# Altium PCB UPCNSL-ABS-FLS-ARD.PcbDoC (part 1 of 2)
Units mm, origin at the board's own origin, x right, y up, seen from the top; angles counter-clockwise.
Board outline 96 x 90 mm, 2 copper layers (Top Layer, Bottom Layer); 116 components, 156 nets, 541 pads, 110 vias.
Unrouted connection lines stored in the file: 18.
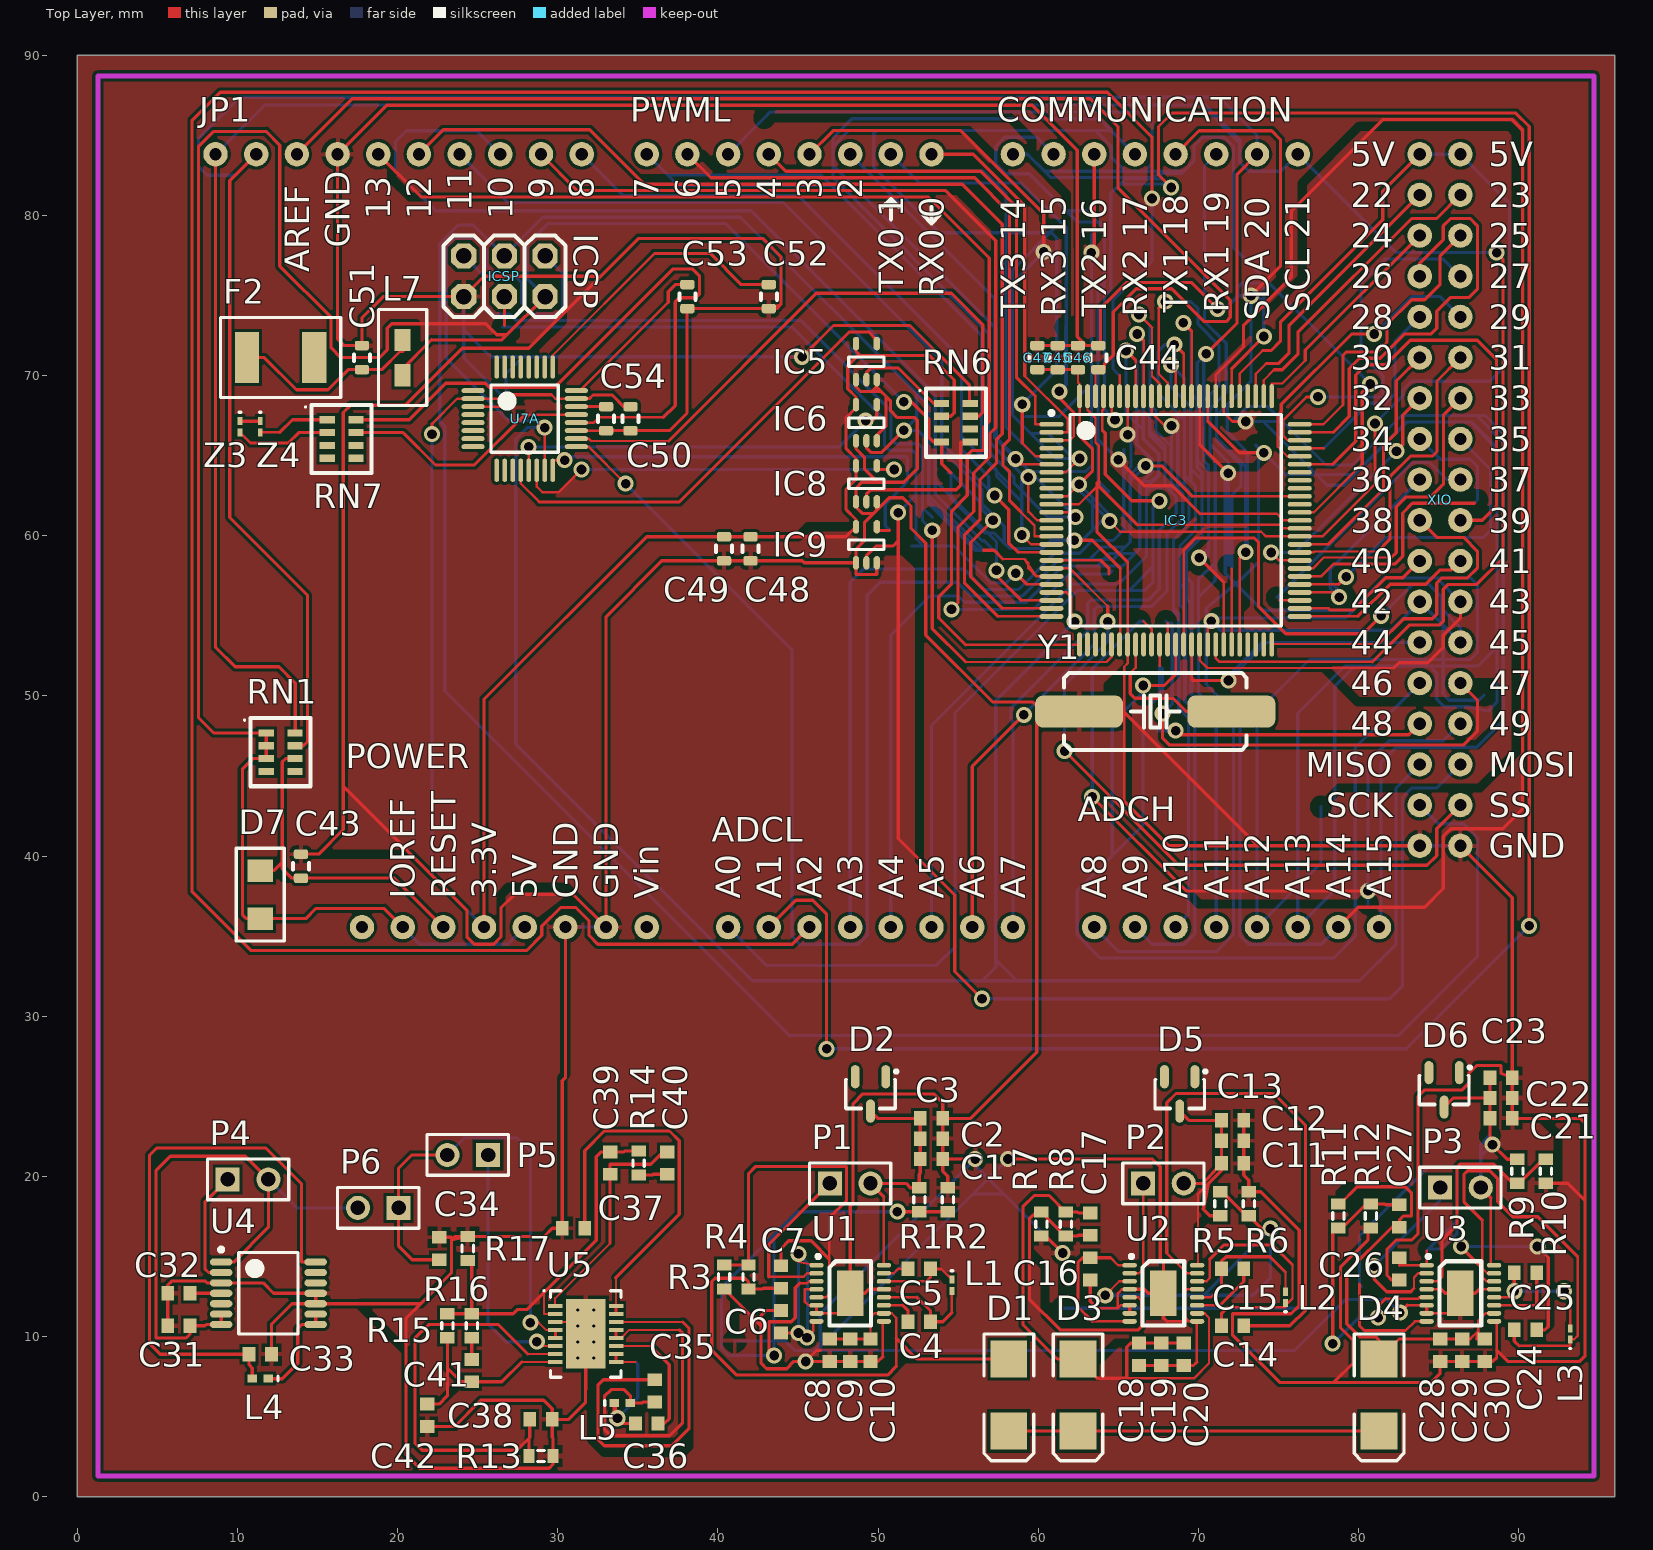
[diagram p0: Top Layer view]
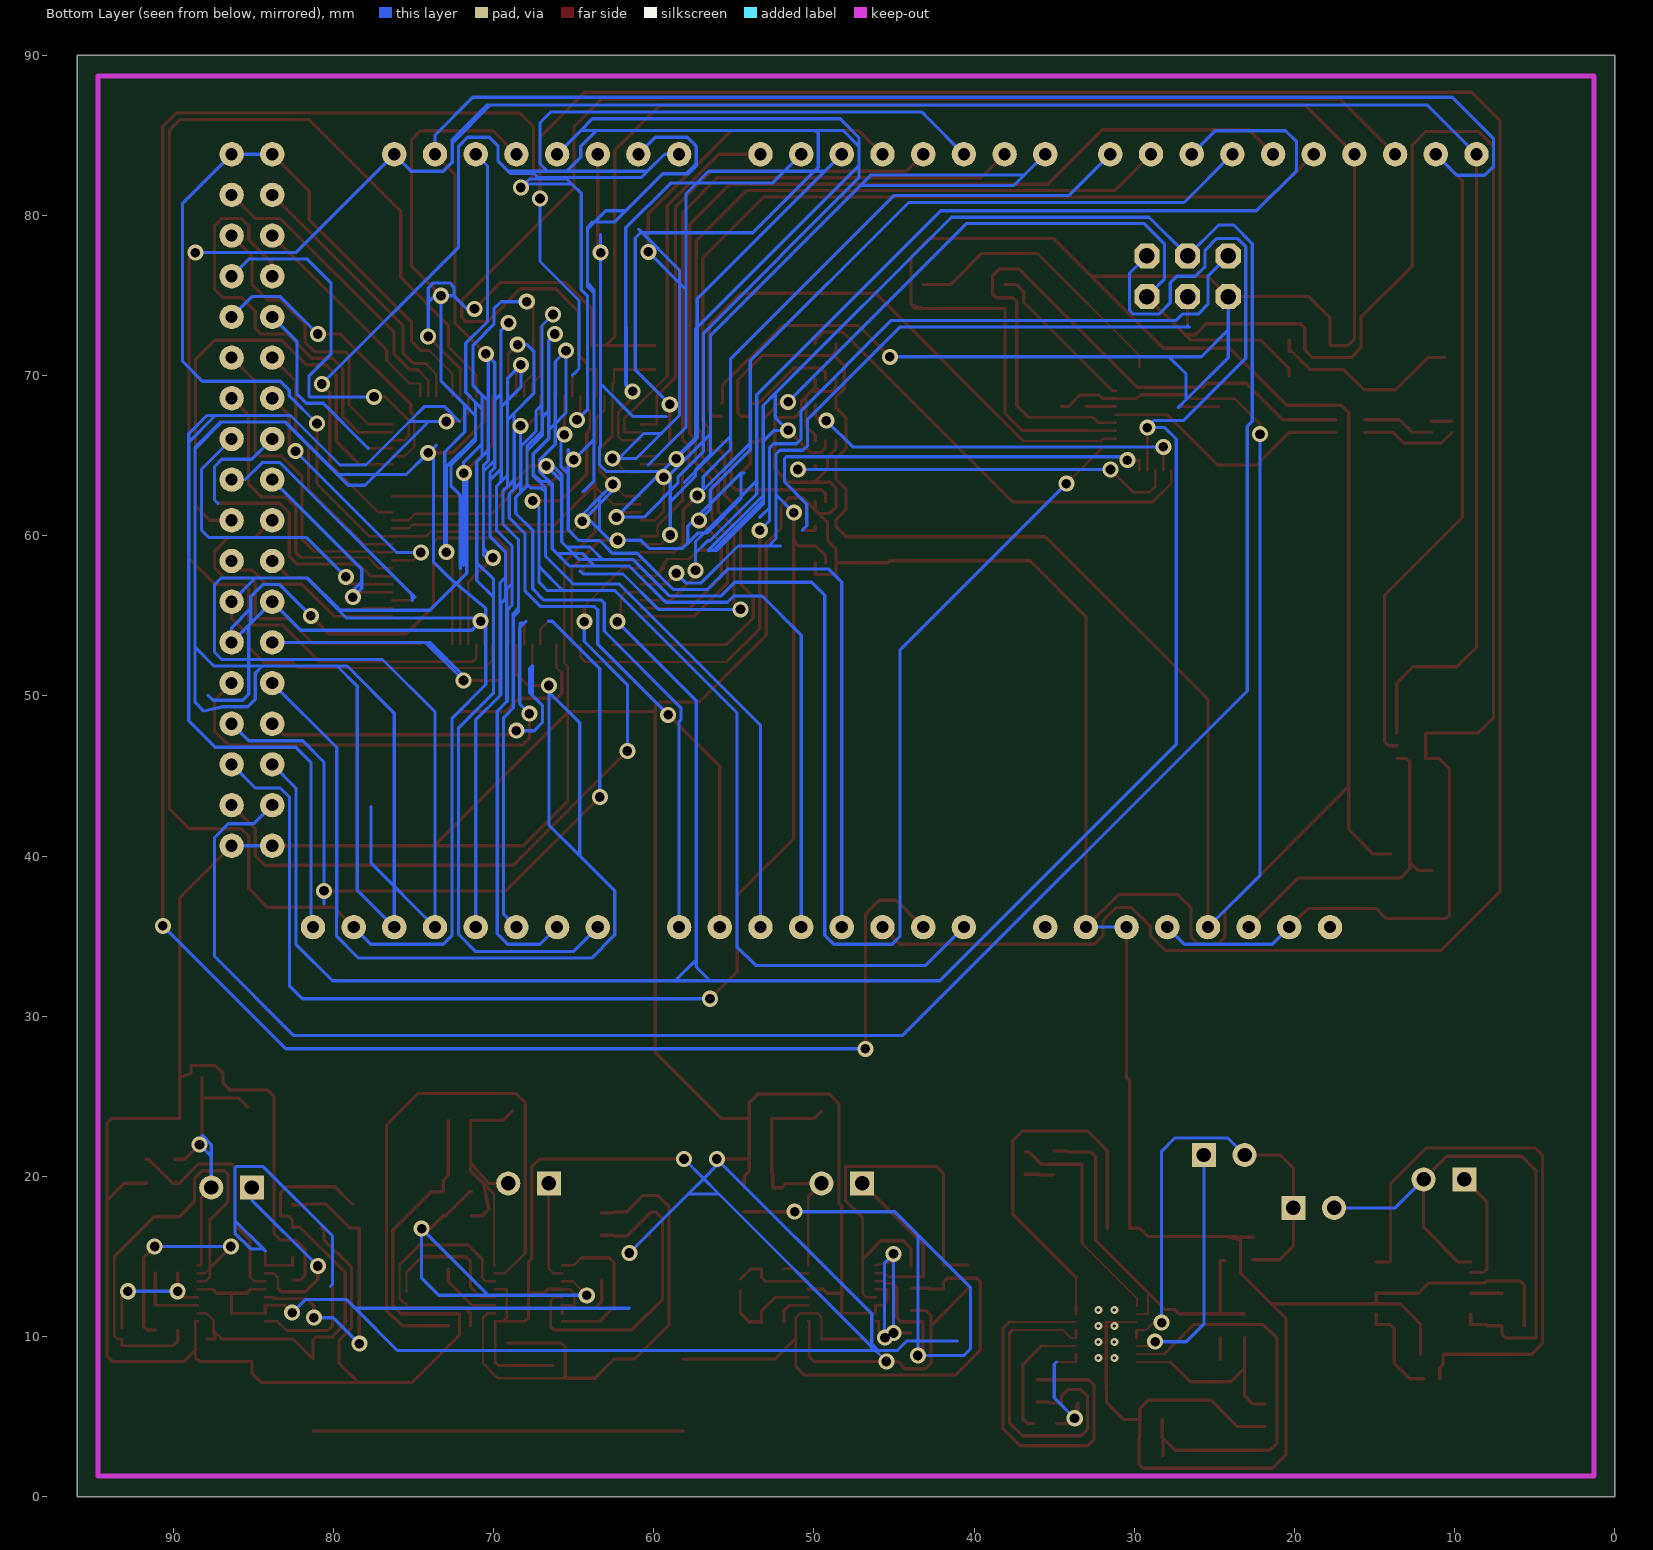
[diagram p1: Bottom Layer view, seen from below]

## Layer stack, top to bottom
Top Solder: solder mask 0.0102, Solder Resist, Dk 3.5
Top Layer: signal copper 0.0356
Dielectric 1: dielectric 0.32, FR-4, Dk 4.8
Bottom Layer: signal copper 0.0356
Bottom Solder: solder mask 0.0102, Solder Resist, Dk 3.5

## Board outline
0,0 96,0 96,90 0,90

## Design rules (kind name [scope] priority, off if disabled: settings)
Clearance [All] p1: gap=0.2
PolygonConnect [All] p1: connectstyle=Relief reliefconductorwidth=0.254 reliefentries=4 polygonreliefangle="90 Angle" airgapwidth=0.254
RoutingVias [All] p1: holewidth=0.6 width=1 viastyle="Through Hole" minholewidth=0.711 minwidth=1.27 maxholewidth=0.711 maxwidth=1.27
SMDNeckDown [All] p1: percent=50.000
SolderMaskExpansion [All] p1: expansion=0.102
UnpouredPolygon [All] p1: allowunpoured=FALSE
Width [All] p1: maxlimit=0.2 minlimit=0.2 preferedwidth=0.2
29 further rules are at their usual default settings.

## Components (designator, comment, footprint, x,y, rotation, side; value= is the part's Value field where it differs from the comment)
ADCH "8x1F-H8.5" ADCH 63.5,35.56 r0 top
ADCL "8x1F-H8.5" ADCL 40.64,35.56 r0 top
C1 "Cap Semi" 1608[0603] 53.34,21.082 r180 top
C2 "Cap Semi" 1608[0603] 53.34,22.352 r180 top
C3 "Cap Semi" 1608[0603] 53.34,23.622 r180 top
C4 "Cap Semi" 1608[0603] 52.578,10.922 r0 top
C5 "Cap Semi" 1608[0603] 52.578,14.224 r0 top
C6 "Cap Semi" 1608[0603] 43.942,10.922 r270 top
C7 "Cap Semi" 1608[0603] 43.942,13.716 r270 top
C8 "Cap Semi" 1608[0603] 46.99,9.144 r90 top
C9 "Cap Semi" 1608[0603] 48.26,9.144 r90 top
C10 "Cap Semi" 1608[0603] 49.53,9.144 r90 top
C11 "Cap Semi" 1608[0603] 72.136,20.828 r180 top
C12 "Cap Semi" 1608[0603] 72.136,22.225 r180 top
C13 "Cap Semi" 1608[0603] 72.136,23.495 r180 top
C14 "Cap Semi" 1608[0603] 72.136,10.668 r180 top
C15 "Cap Semi" 1608[0603] 72.136,14.224 r180 top
C16 "Cap Semi" 1608[0603] 63.246,14.224 r90 top
C17 "Cap Semi" 1608[0603] 63.246,17.018 r90 top
C18 "Cap Semi" 1608[0603] 66.294,8.89 r90 top
C19 "Cap Semi" 1608[0603] 67.691,8.89 r90 top
C20 "Cap Semi" 1608[0603] 69.088,8.89 r90 top
C21 "Cap Semi" 1608[0603] 88.9,23.622 r180 top
C22 "Cap Semi" 1608[0603] 88.9,24.892 r180 top
C23 "Cap Semi" 1608[0603] 88.9,26.162 r180 top
C24 "Cap Semi" 1608[0603] 90.424,10.414 r180 top
C25 "Cap Semi" 1608[0603] 90.424,13.97 r180 top
C26 "Cap Semi" 1608[0603] 82.55,14.224 r90 top
C27 "Cap Semi" 1608[0603] 82.55,17.526 r90 top
C28 "Cap Semi" 1608[0603] 85.09,9.144 r90 top
C29 "Cap Semi" 1608[0603] 86.487,9.144 r90 top
C30 "Cap Semi" 1608[0603] 87.884,9.144 r90 top
C31 "Cap Semi" 1608[0603] 6.35,10.668 r0 top
C32 "Cap Semi" 1608[0603] 6.35,12.7 r0 top
C33 "Cap Semi" 1608[0603] 11.43,8.89 r180 top
C34 "Cap Semi" 1608[0603] 22.606,15.494 r270 top
C35 "Cap Semi" 1608[0603] 36.068,6.604 r90 top
C36 "Cap Semi" 1608[0603] 35.56,4.572 r0 top
C37 "Cap Semi" 1608[0603] 30.988,16.764 r0 top
C38 "Cap Semi" 1608[0603] 28.956,4.826 r180 top
C39 "Cap Semi" 1608[0603] 33.274,20.828 r270 top
C40 "Cap Semi" 1608[0603] 36.83,20.828 r270 top
C41 "Cap Semi" 1608[0603] 24.638,7.874 r90 top
C42 "Cap Semi" 1608[0603] 21.844,5.08 r90 top
C43 "22p" CAP0603 13.97,39.37 r90 top
C44 "100n" CAP0603 63.754,71.12 r90 top
C45 "100n" CAP0603 61.214,71.12 r90 top
C46 "100n" CAP0603 62.484,71.12 r90 top
C47 "100n" CAP0603 59.944,71.12 r90 top
C48 "100n" CAP0603 42.037,59.182 r270 top
C49 "100n" CAP0603 40.386,59.182 r270 top
C50 "100n" CAP0603 34.544,67.31 r270 top
C51 "100n" CAP0603 17.78,71.12 r90 top
C52 "22p" CAP0603 43.18,74.93 r90 top
C53 "22p" CAP0603 38.1,74.93 r90 top
C54 "100n" CAP0603 33.02,67.31 r270 top
COMMUNICATION "8x1F-H8.5" COMMUNICATION 58.42,83.82 r0 top
D1 "D Schottky" SMB 58.166,6.35 r270 top
D2 "HSMS-2824-TR1G" SOT23-3 49.53,25.146 r180 top
D3 "D Schottky" SMB 62.484,6.35 r270 top
D4 "D Schottky" SMB 81.28,6.35 r270 top
D5 "HSMS-2824-TR1G" SOT23-3 68.834,25.146 r180 top
D6 "HSMS-2824-TR1G" SOT23-3 85.344,25.4 r180 top
D7 "CD1206-S01575" "SMD DIODE" 11.43,37.592 r270 top
F2 "MF-MSMF050-2 500mA" FUSE 12.7,71.12 r0 top
IC3 "ATMEGA2560-16AU" TSQFP50P1600X1600X120-100N 68.58,60.96 r0 top
IC5 "74LVC1G125DCK" SOT65P210X110-5N 49.276,70.866 r90 top
IC6 "74LVC1G125DCK" SOT65P210X110-5N 49.276,67.056 r90 top
IC8 "74LVC1G125DCK" SOT65P210X110-5N 49.276,63.246 r90 top
IC9 "74LVC1G125DCK" SOT65P210X110-5N 49.276,59.436 r90 top
ICSP "3x2M" "Header 3x2" 29.21,77.47 r270 top
JP1 "10x1F-H8.5" "HEADER 1X10" 8.636,83.82 r0 top
L1 "Inductor" 0603 54.61,13.208 r270 top
L2 "Inductor" 0603 75.438,12.446 r90 top
L3 "Inductor" 0603 93.218,10.16 r90 top
L4 "Inductor" 0402-A 11.43,7.366 r180 top
L5 "Inductor" 0402-A 34.036,5.842 r0 top
L7 "MH2029-300Y" INDUCTOR 20.32,71.12 r90 top
P1 "Switch" HDR1X2 46.99,19.558 r0 top
P2 "Switch" HDR1X2 66.548,19.558 r0 top
P3 "Header 2" HDR1X2 85.09,19.304 r0 top
P4 "Header 2" HDR1X2 9.398,19.812 r0 top
P5 "Header 2" HDR1X2 25.654,21.336 r180 top
P6 "Header 2" HDR1X2 20.066,18.034 r180 top
POWER "8x1F-H8.5" POWER 17.78,35.56 r0 top
PWML "8x1F-H8.5" PWM 35.56,83.82 r0 top
R1 "Res3" J1-0603 52.578,18.542 r90 top
R2 "Res3" J1-0603 54.356,18.542 r270 top
R3 "Res3" J1-0603 40.386,13.716 r90 top
R4 "Res3" J1-0603 41.91,13.716 r270 top
R5 "Res3" J1-0603 71.374,18.288 r270 top
R6 "Res3" J1-0603 73.152,18.288 r270 top
R7 "Res3" J1-0603 60.198,17.018 r90 top
R8 "Res3" J1-0603 61.722,17.018 r90 top
R9 "Res3" J1-0603 89.916,20.32 r90 top
R10 "Res3" J1-0603 91.694,20.32 r90 top
R11 "Res3" J1-0603 78.74,17.526 r90 top
R12 "Res3" J1-0603 80.772,17.526 r90 top
R13 "Res3" J1-0603 28.956,2.54 r180 top
R14 "Res3" J1-0603 35.052,20.828 r270 top
R15 "Res3" J1-0603 23.114,10.668 r270 top
R16 "Res3" J1-0603 24.638,10.668 r270 top
R17 "Res3" J1-0603 24.384,15.494 r270 top
RN1 "10K" CAF-80P319X159-8N 12.7,46.482 r0 top
RN6 "10K" CAF-80P319X159-8N 54.864,67.056 r0 top
RN7 "22R" CAF-80P319X159-8N 16.51,66.04 r0 top
U1 "LTC3129IMSE" MSOP-16 48.26,12.7 r270 top
U2 "LTC3129IMSE" MSOP-16 67.818,12.7 r270 top
U3 "LTC3129IMSE" MSOP-16 86.36,12.7 r270 top
U4 "LM2852YMXA" "TSOP65P650X110-14N (LM2852YMXA)" 11.938,12.7 r0 top
U5 "LTC3112EDHD#PBF" SON50P400X85_HS-17N 31.75,10.16 r0 top
U7A "MAX3421EEHJ" TSQFP50P700X700X120-32N 27.94,67.31 r0 top
XIO "18x2F-H8.5" "HEADER 2X18" 83.82,83.82 r0 top
Y1 "16MHz CSTCE16M0V53-R0" 9C-16.000MEEJ-T 67.31,49.022 r180 top
Z3 "CG0603MLC-05E" 0603 10.16,66.802 r270 top
Z4 "CG0603MLC-05E" 0603 11.43,66.802 r270 top

## Footprints (in the part's own frame and the unit in brackets; to place one, negate y for a bottom-side part, rotate by r counter-clockwise, add the part's x,y. Pads: shape width x height; smd on the part's side, far side on the other; paste and mask are expansions set on the pad)
9C-16.000MEEJ-T [mm] "16 MHz Crystal"
  rrect50% 5.5x2 smd: 1(-4.75,0) 2(4.75,0)
  silkscreen extent -5.7,-2.4 5.7,2.4, body extent -6.35,-2.35 6.35,2.35, height 4.22
0402-A [mm] "Chip Inductor, Body 1.0x0.5mm, IPC High Density"
  rect 0.6x0.5 smd: 1(-0.5,0) 2(0.5,0)
  silkscreen extent -1.1,-0.15 -1.1,0.15, body extent -0.55,-0.3 0.55,0.3, height 0.55
0603 [mm] "Chip Inductor, Body 0.6x0.3mm, IPC High Density"
  rect 0.5x0.3 smd: 1(-0.35,0) 2(0.35,0)
  silkscreen extent -0.9,-0.05 -0.9,0.05, body extent -0.33,-0.18 0.33,0.18, height 0.55
1608[0603] [mm] "Chip Capacitor, Body 1.6x0.8mm, IPC High Density"
  rect 0.8x0.9 smd: 1(-0.7,0) 2(0.7,0)
  body extent -0.87,-0.48 0.87,0.48, height 1.3
ADCH [mil]
  round 60 hole 30: 1(0,0) 2(100,0) 3(200,0) 4(300,0) 5(400,0) 6(500,0) 7(600,0) 8(700,0)
  body extent -50,-50 750,50, height 276
ADCL [mil]
  round 60 hole 30: 1(0,0) 2(100,0) 3(200,0) 4(300,0) 5(400,0) 6(500,0) 7(600,0) 8(700,0)
  body extent -50,-50 750,50, height 276
CAF-80P319X159-8N [mm] "Chip Array, Flat, 8-Leads, Pitch 0,80mm,  Body 3,20x1,60mm,  IPC Medium Density"
  rect 0.95x0.45 smd: 1(-0.9,1.2) 2(0.9,1.2) 3(-0.9,0.4) 4(0.9,0.4) 5(-0.9,-0.4) 6(0.9,-0.4) 7(-0.9,-1.2) 8(0.9,-1.2)
  silkscreen extent -2.3,-2.13 1.87,2.13, body extent -0.78,-1.6 0.83,1.6, height 0.5
CAP0603 [mm] "Capacitor Chip Inductor, Body 0.6x0.3mm, IPC High Density"
  rrect50% 0.6x0.9 smd: 1(-0.75,0) 2(0.75,0)
  silkscreen extent -0.2,-0.5 0.2,0.5, body extent -0.76,-0.38 0.76,0.38, height 0.76
COMMUNICATION [mil]
  round 60 hole 30: 1(700,0) 2(600,0) 3(500,0) 4(400,0) 5(300,0) 6(200,0) 7(100,0) 8(0,0)
  body extent -50,-50 750,50, height 276
FUSE [mm]
  rect 1.5x3.2 smd: 1(-2.1,0) 2(2.1,0)
  silkscreen extent -3.75,-2.5 3.75,2.5, body extent -2.41,-1.61 2.41,1.61, height 1.32
HDR1X2 [mm] "Connector; Header; 2 Position"
  rect 1.5x1.5 hole 0.9: 1(0,0)
  round 1.5 hole 0.9: 2(2.54,0)
  silkscreen extent -1.27,-1.27 3.81,1.27
"HEADER 1X10" [mil]
  round 60 hole 30: 1(0,0) 2(100,0) 3(200,0) 4(300,0) 5(400,0) 6(500,0) 7(600,0) 8(700,0) 9(800,0) 10(900,0)
  body extent -50,-50 950,50, height 276
"HEADER 2X18" [mil]
  round 60 hole 30: 1(0,0) 2(100,0) 3(0,-100) 4(100,-100) 5(0,-200) 6(100,-200) 7(0,-300) 8(100,-300) 9(0,-400) 10(100,-400) 11(0,-500) 12(100,-500) 13(0,-600) 14(100,-600) 15(0,-700) 16(100,-700) 17(0,-800) 18(100,-800) 19(0,-900) 20(100,-900) 21(0,-1000) 22(100,-1000) 23(0,-1100) 24(100,-1100) 25(0,-1200) 26(100,-1200) 27(0,-1300) 28(100,-1300) 29(0,-1400) 30(100,-1400) 31(0,-1500) 32(100,-1500) 33(0,-1600) 34(100,-1600) 35(0,-1700) 36(100,-1700)
  body extent -50,-1737 150,36, height 327
"Header 3x2" [mm]
  oct 1.575x1.575 hole 0.965: 1(0,0) 2(2.54,0) 3(0,-2.54) 4(2.54,-2.54) 5(0,-5.08) 6(2.54,-5.08)
  silkscreen extent -1.27,-6.35 3.81,1.27, body extent -1.27,-6.35 3.81,1.27, height 8.38
INDUCTOR [mm]
  rect 1.4x1 smd: 1(-1.1,0) 2(1.1,0)
  silkscreen extent -3,-1.5 3,1.5, body extent -1,-0.6 1,0.6, height 0.95
J1-0603 [mm] "Chip Resistor, Body 1.6x0.8mm, IPC High Density"
  rect 0.7x0.9 smd: 1(-0.75,0) 2(0.75,0)
  silkscreen extent -0.2,-0.35 0.2,0.35, body extent -0.85,-0.48 0.85,0.48, height 0.9
MSOP-16 [mm] "16-Lead Plastic MSOP, Exposed Die Pad"
  oval 0.305x0.889 smd: 1(-1.75,-2.107) 2(-1.25,-2.107) 3(-0.75,-2.107) 4(-0.25,-2.107) 5(0.25,-2.107) 6(0.75,-2.107) 7(1.25,-2.107) 8(1.75,-2.107) 9(1.75,2.107) 10(1.25,2.107) 11(0.75,2.107) 12(0.25,2.107) 13(-0.25,2.107) 14(-0.75,2.107) 15(-1.25,2.107) 16(-1.75,2.107)
  rect 2.845x1.651 smd: 17(0,0)
  silkscreen extent -2.4,-2.1 2,1.3, body extent -2.02,-2.45 2.02,2.45, height 0.96
POWER [mil]
  round 60 hole 30: 1(0,0) 2(100,0) 3(200,0) 4(300,0) 5(400,0) 6(500,0) 7(600,0) 8(700,0)
  body extent -50,-50 750,50, height 276
PWM [mil]
  round 60 hole 30: 1(700,0) 2(600,0) 3(500,0) 4(400,0) 5(300,0) 6(200,0) 7(100,0) 8(0,0)
  silkscreen extent 580,-170 720,-110, body extent -50,-50 750,50, height 276
SMB [mm] "DO-214-AA/SMB; 2 C-Bend Leads; Body 5.3 x 3.6 mm, inc. leads (LxW)"
  rect 2.3x2.3 smd: 1(-2.25,0) 2(2.25,0)
  silkscreen extent -3.8,-1.55 4.1,1.55
"SMD DIODE" [mm]
  rect 1.4x1.6 smd: A(-1.5,0) K(1.5,0)
  silkscreen extent -2.9,-1.5 2.9,1.5, body extent -1.67,-0.86 1.68,0.87, height 0.85
SON50P400X85_HS-17N [mm] "SON, 16-Leads, Body 5.00x4.00mm, Pitch 0.50mm, Thermal Pad 4.34x2.44mm, IPC Medium Density"
  rect 0.9x0.25 smd mask+0: 1(-1.895,1.75) 2(-1.895,1.25) 3(-1.895,0.75) 4(-1.895,0.25) 5(-1.895,-0.25) 6(-1.895,-0.75) 7(-1.895,-1.25) 8(-1.895,-1.75) 9(1.895,-1.75) 10(1.895,-1.25) 11(1.895,-0.75) 12(1.895,-0.25) 13(1.895,0.25) 14(1.895,0.75) 15(1.895,1.25) 16(1.895,1.75)
  rect 2.44x4.34 smd paste-1.22 mask+0: 17(0,0)
  silkscreen extent -2.65,-2.7 2.2,2.75, body extent -2.05,-2.55 2.05,2.55, height 0.85
SOT23-3 [mm] "SOT-23-3; 3 Leads; Body 3 x 3 mm, inc. leads (LxW max)"
  oval 0.55x1.45 smd: 1(-0.95,-1.075) 2(0.95,-1.075) 3(0,1.075)
  silkscreen extent -1.7,-1.5 1.55,0.9, body extent -1.5,-1.25 1.5,1.25, height 1.09
SOT65P210X110-5N [mm] "SOT23, 5-Leads, Body 2,00x2,10mm, Pitch 0,65mm, IPC Medium Density"
  oval 0.85x0.4 smd: 1(-1.125,0.65) 2(-1.125,0) 3(-1.125,-0.65) 4(1.125,-0.65) 5(1.125,0.65)
  silkscreen extent -0.3,-1.1 0.3,1.1, body extent -0.7,-1.07 0.7,1.08, height 1.1
"TSOP65P650X110-14N (LM2852YMXA)" [mm] "TSOP, 14-Leads, Body 5,00x4,40mm, Pitch 0,65mm, IPC Medium Density"
  oval 1.4x0.45 smd: 1(-2.95,1.95) 2(-2.95,1.3) 3(-2.95,0.65) 4(-2.95,0) 5(-2.95,-0.65) 6(-2.95,-1.3) 7(-2.95,-1.95) 8(2.95,-1.95) 9(2.95,-1.3) 10(2.95,-0.65) 11(2.95,0) 12(2.95,0.65) 13(2.95,1.3) 14(2.95,1.95)
  silkscreen extent -3.07,-2.55 1.85,2.85, body extent -2.25,-2.55 2.25,2.55, height 1.1
TSQFP50P700X700X120-32N [mm] "TSQFP, 32-Leads, Body 5,00x5,00mm, Pitch 0,50mm, IPC Medium Density"
  oval 1.45x0.3 smd: 1(-3.225,1.75) 2(-3.225,1.25) 3(-3.225,0.75) 4(-3.225,0.25) 5(-3.225,-0.25) 6(-3.225,-0.75) 7(-3.225,-1.25) 8(-3.225,-1.75) 17(3.225,-1.75) 18(3.225,-1.25) 19(3.225,-0.75) 20(3.225,-0.25) 21(3.225,0.25) 22(3.225,0.75) 23(3.225,1.25) 24(3.225,1.75)
  oval 0.3x1.45 smd: 9(-1.75,-3.225) 10(-1.25,-3.225) 11(-0.75,-3.225) 12(-0.25,-3.225) 13(0.25,-3.225) 14(0.75,-3.225) 15(1.25,-3.225) 16(1.75,-3.225) 25(1.75,3.225) 26(1.25,3.225) 27(0.75,3.225) 28(0.25,3.225) 29(-0.25,3.225) 30(-0.75,3.225) 31(-1.25,3.225) 32(-1.75,3.225)
  silkscreen extent -2.1,-2.1 2.1,2.1, body extent -2.5,-2.5 2.5,2.5, height 1.2
TSQFP50P1600X1600X120-100N [mm] "TSQFP, 100-Leads, Body 14,00x14,00mm, Pitch 0,50mm, IPC Medium Density"
  oval 1.5x0.3 smd: 1(-7.75,6) 2(-7.75,5.5) 3(-7.75,5) 4(-7.75,4.5) 5(-7.75,4) 6(-7.75,3.5) 7(-7.75,3) 8(-7.75,2.5) 9(-7.75,2) 10(-7.75,1.5) 11(-7.75,1) 12(-7.75,0.5) 13(-7.75,0) 14(-7.75,-0.5) 15(-7.75,-1) 16(-7.75,-1.5) 17(-7.75,-2) 18(-7.75,-2.5) 19(-7.75,-3) 20(-7.75,-3.5) 21(-7.75,-4) 22(-7.75,-4.5) 23(-7.75,-5) 24(-7.75,-5.5) 25(-7.75,-6) 51(7.75,-6) 52(7.75,-5.5) 53(7.75,-5) 54(7.75,-4.5) 55(7.75,-4) 56(7.75,-3.5) 57(7.75,-3) 58(7.75,-2.5) 59(7.75,-2) 60(7.75,-1.5) 61(7.75,-1) 62(7.75,-0.5) 63(7.75,0) 64(7.75,0.5) 65(7.75,1) 66(7.75,1.5) 67(7.75,2) 68(7.75,2.5) 69(7.75,3) 70(7.75,3.5) 71(7.75,4) 72(7.75,4.5) 73(7.75,5) 74(7.75,5.5) 75(7.75,6)
  oval 0.3x1.5 smd: 26(-6,-7.75) 27(-5.5,-7.75) 28(-5,-7.75) 29(-4.5,-7.75) 30(-4,-7.75) 31(-3.5,-7.75) 32(-3,-7.75) 33(-2.5,-7.75) 34(-2,-7.75) 35(-1.5,-7.75) 36(-1,-7.75) 37(-0.5,-7.75) 38(0,-7.75) 39(0.5,-7.75) 40(1,-7.75) 41(1.5,-7.75) 42(2,-7.75) 43(2.5,-7.75) 44(3,-7.75) 45(3.5,-7.75) 46(4,-7.75) 47(4.5,-7.75) 48(5,-7.75) 49(5.5,-7.75) 50(6,-7.75) 76(6,7.75) 77(5.5,7.75) 78(5,7.75) 79(4.5,7.75) 80(4,7.75) 81(3.5,7.75) 82(3,7.75) 83(2.5,7.75) 84(2,7.75) 85(1.5,7.75) 86(1,7.75) 87(0.5,7.75) 88(0,7.75) 89(-0.5,7.75) 90(-1,7.75) 91(-1.5,7.75) 92(-2,7.75) 93(-2.5,7.75) 94(-3,7.75) 95(-3.5,7.75) 96(-4,7.75) 97(-4.5,7.75) 98(-5,7.75) 99(-5.5,7.75) 100(-6,7.75)
  silkscreen extent -7.87,-6.6 6.6,6.82, body extent -7,-7 7,7, height 1.2

## Part data
ADCH ADCL COMMUNICATION POWER PWML: library part PINHD-1X8, "<b>PIN HEADER</b>"
C1 C2 C3 C4 C5 C6 C7 C8 C9 C10 C11 C12 C13 C14 C15 C16 C17 C18 C19 C20 C21 C22 C23 C24 C25 C26 C27 C28 C29 C30 C31 C32 C33 C34 C35 C36 C37 C38 C39 C40 C41 C42: "Capacitor (Semiconductor SIM Model)"
C43 C44 C45 C46 C47 C48 C49 C50 C51 C52 C53 C54: library part C-EU0603-RND, "<B>CAPACITOR</B>, European symbol"
D1 D3 D4: "Schottky Diode"
D2 D5 D6: "DIODE, RF, SCHOTTKY, DUAL, SOT-23"
D7: library part DIODE
F2: library part L-EUL1812, "<B>INDUCTOR</B>, European symbol"
IC3: library part ATMEGA2560AU, "<b>MICROCONTROLLER</b><p> / 64/128/256 Kbytes FLASH<p> / 4 Kbytes EEPROM<p> / 8 Kbytes SRAM<p> / 86 General Purpose I/O pins<p> / 12-channels16-bit PWM<p> / 4 x Serial USARTs<p> / 16-channels 10-bit A/D<p>"
ICSP: library part PINHD-2X3, "<b>PIN HEADER</b>"
JP1: library part PINHD-1X10, "<b>PIN HEADER</b>"
L7: library part WE-CBF_0805, "SMD EMI Suppression Ferrite Beads / - excellent anti-EMI properties  / - low DCR / - impedances till 3000 ohms / - rated current up to 6 A"
P1 P2: library part "Header 2", "Header, 2-Pin"
P3 P4 P5 P6: "Header, 2-Pin"
R1 R2 R3 R4 R5 R6 R7 R8 R9 R10 R11 R12 R13 R14 R15 R16 R17: "Resistor"
RN1 RN6 RN7: library part RES_ARRAY
U1 U2 U3: library part LTC3129, "15V, 200mA Synchronous Buck-Boost DC/DC Converter with 1.3µA Quiescent Current"
U5: "IC REG BUCK BOOST ADJ 2.5A 16DFN"
U7A: "MAX3421 SPI to USB Interface Chip"
XIO: library part PINHD-2X18, "<b>PIN HEADER</b>"
Y1: library part RESONATORMU
Z3 Z4: library part VARISTORCN0603, "<b>VARISTOR</b>"

## Via types
v1: diameter 1, hole 0.6, Top Layer to Bottom Layer, 102 vias
v2: diameter 0.5, hole 0.2, Top Layer to Bottom Layer, 8 vias

## Nets (pads, with @x,y where several pads share a name; then routed paths per layer and width w, separated by ;. In a path a pad name is that pad's centre, name@x,y a point inside that pad or via, vN(x,y) a via of type N, cw(c..) or ccw(c..) an arc to the next point about the centre after c; other vN are vias at no path point)
3.3V: C33.2 L4.2 U4.14 | length 36.2
  Top Layer w0.2: L4.2@10.93,7.366 10.93,8.026 10.73,8.226 C33.2@10.73,8.89 5.182,8.89 4.521,9.55 4.521,21.336 4.953,21.768 11.786,21.768 14.001,19.552 14.001,14.65 U4.14@14.888,14.65
3.8V: C31.2 P4.2 P6.2 U4.1 U4.6 U4.7 | length 37
  Top Layer w0.2: U4.6@8.988,11.4 U4.7@8.988,10.75 8.058,10.75 7.976,10.668 C31.2@7.05,10.668 7.05,10.16 6.796,9.906 4.928,9.906 4.928,20.371 5.817,21.26 10.49,21.26 P4.2@11.938,19.812 11.938,16.815 9.773,14.65 U4.1@8.988,14.65
  Bottom Layer w0.2: P4.2@11.938,19.812 13.716,18.034 P6.2@17.526,18.034
5V: C41.1 C42.2 R15.2 U5.8 | length 12.7
  Top Layer w0.125: 27.754,8.41 U5.8@29.855,8.41
  Top Layer w0.2: C42.2@21.844,5.78 22.595,5.78 23.114,6.299 23.114,8.038 ; R15.2@23.114,9.918 23.114,8.038 ; 27.754,8.41 26.518,7.174 C41.1@24.638,7.174 23.978,7.174 23.114,8.038
ADC0: ADCL.1 IC3.97 | length 62.4
  Top Layer w0.15: 64.008,66.573 64.008,67.848 64.08,67.92 IC3.97@64.08,68.71
  Top Layer w0.2: 64.008,66.573 64.186,66.396 64.186,63.835 65.842,62.179 v1(67.564,62.179)
  Bottom Layer w0.2: ADCL.1@40.64,35.56 43.028,33.172 53.645,33.172 54.813,34.341 54.813,48.961 62.43,56.579 65.685,56.579 ; v1(67.564,62.179) 67.164,61.779 67.164,58.058 ; 65.685,56.579 67.164,58.058 ; 65.685,56.579 66.65,56.579 67.164,57.093 67.164,58.058
ADC1: ADCL.2 IC3.96 | length 161.5
  Top Layer w0.15: IC3.96@64.58,68.71 64.58,67.449 v1(64.795,67.234)
  Top Layer w0.2: ADCL.2@43.18,35.56 44.856,37.236 45.923,37.236 46.787,36.373 v1(46.787,27.965) ; v1(68.301,81.737) 67.513,82.525 67.513,85.547 68.351,86.385 89.814,86.385 90.653,85.547 v1(90.653,35.636)
  Bottom Layer w0.2: v1(46.787,27.965) 82.982,27.965 v1(90.653,35.636) ; v1(64.795,67.234) 64.135,67.894 64.135,74.949 64.535,75.349 64.535,81.375 65.118,81.958 ; v1(68.301,81.737) v1@68.08,81.958 ; 65.118,81.958 v1@68.08,81.958 ; 65.118,81.958 65.43,82.271 67.767,82.271 v1@68.08,81.958
ADC2: ADCL.3 IC3.95 | length 171.2
  Top Layer w0.15: IC3.95@65.08,68.71 65.08,70.023
  Top Layer w0.2: ADCL.3@45.72,35.56 44.653,34.493 32.512,34.493 31.953,35.052 31.953,35.966 31.14,36.779 30.175,36.779 29.007,35.611 29.007,35.052 28.053,34.098 10.86,34.098 7.163,37.795 7.163,85.903 8.941,87.681 64.313,87.681 67.107,84.887 v1(67.107,81.051)
  Bottom Layer w0.2: 65.08,70.023 64.948,70.155 64.668,70.434 64.668,74.683 67.107,77.121 v1(67.107,81.051) v1@67.107,81.458
ADC3: ADCL.4 IC3.94 | length 51.2
  Top Layer w0.15: v1(65.58,66.31) IC3.94@65.58,68.71
  Bottom Layer w0.2: ADCL.4@48.26,35.56 48.26,57.099 49.073,57.912 55.386,57.912 56.657,56.641 58.777,56.641 61.044,58.908 62.586,58.908 63.381,59.703 64.675,59.703 65.341,60.37 65.341,63.875 ; 65.341,65.38 65.341,63.875 ; v1(65.58,66.31) 65.799,66.091 65.799,64.332 65.341,63.875
ADC4: ADCL.5 IC3.93 | length 69.5
  Top Layer w0.15: IC3.93@66.08,68.71 66.08,70.953
  Top Layer w0.2: v1(65.481,71.552) 66.08,70.953
  Bottom Layer w0.2: ADCL.5@50.8,35.56 50.8,53.797 53.238,56.236 55.004,56.236 55.399,55.841 59.259,55.841 61.525,58.108 63.684,58.108 ; 63.684,58.108 64.472,58.896 66.065,58.896 ; 63.684,58.108 65.277,58.108 66.065,58.896 ; 66.065,58.896 66.321,59.152 ; 66.154,66.993 66.154,65.698 67.121,64.732 67.121,63.977 66.321,63.177 66.321,59.152 ; 66.154,66.993 66.154,70.879 v1(65.481,71.552) 65.481,67.666 66.154,66.993 ; 66.154,66.993 66.548,66.599 66.548,66.04 67.508,65.079 67.508,63.842 67.056,63.39 66.65,63.39 66.357,63.097 66.357,59.188 66.321,59.152
ADC5: ADCL.6 IC3.92 | length 55.7
  Top Layer w0.15: IC3.92@66.58,68.71 66.58,72.187
  Top Layer w0.2: v1(66.174,72.593) 66.58,72.187
  Bottom Layer w0.2: ADCL.6@53.34,35.56 53.34,48.174 62.151,56.985 65.024,56.985 66.764,58.725 66.764,62.695 ; v1(66.174,72.593) 66.554,72.213 66.554,67.793 ; 66.554,67.793 66.954,67.393 66.954,66.271 67.908,65.317 67.908,63.195 67.7,62.987 67.056,62.987 66.764,62.695 ; 66.554,67.793 66.554,66.098 67.521,65.132 67.521,63.744 66.764,62.987 66.764,62.695
ADC6: ADCL.7 IC3.91 | length 45.9
  Top Layer w0.15: IC3.91@67.08,68.71 67.08,67.692 v1@67.92,66.853
  Top Layer w0.2: ADCL.7@55.88,35.56 55.88,45.593 v1(59.106,48.819) ; v1@67.92,66.853 v1(68.326,66.853)
  Bottom Layer w0.2: v1(59.106,48.819) 63.5,53.213 63.5,55.372 63.703,55.575 67.056,55.575 68.047,56.566 68.047,60.138 69.021,61.112 69.021,62.612 68.708,62.924 ; v1@67.92,66.853 68.327,66.445 68.327,63.305 68.708,62.924 ; v1(68.326,66.853) 68.708,66.47 68.708,62.924
ADC7: ADCL.8 IC3.90 | length 57.3
  Top Layer w0.15: 67.107,73 67.107,69.968 67.58,69.494 IC3.90@67.58,68.71
  Top Layer w0.2: v1(66.294,73.812) 67.107,73
  Bottom Layer w0.2: ADCL.8@58.42,35.56 58.42,48.387 58.306,48.501 58.306,49.261 63.094,54.049 63.094,55.795 63.28,55.982 66.859,55.982 67.564,56.687 67.564,60.33 68.621,61.387 68.621,62.393 68.308,62.706 ; v1(66.294,73.812) 66.98,73.127 66.98,68.167 ; 66.98,68.167 67.354,67.793 67.354,66.524 68.308,65.569 68.308,62.706 ; 66.98,68.167 66.98,66.523 67.921,65.582 67.921,63.093 68.308,62.706
ADC8: ADCH.1 IC3.89 | length 66.4
  Top Layer w0.15: 67.526,74.206 67.526,70.104 68.08,69.55 IC3.89@68.08,68.71
  Top Layer w0.2: 67.526,74.206 v1(67.932,74.612)
  Bottom Layer w0.2: ADCH.1@63.5,35.56 65.024,34.036 71.12,34.036 72.187,35.103 72.187,48.018 70.005,50.2 70.005,56.156 ; v1(67.932,74.612) 69.539,74.612 69.984,74.168 69.984,73.191 71.285,71.89 71.285,69.361 70.732,68.808 ; 70.005,56.156 71.053,57.204 71.053,58.318 ; 70.005,56.156 70.005,57.271 71.053,58.318 ; 70.732,64.929 70.732,68.808 ; 70.732,64.929 70.333,65.329 70.333,68.409 70.732,68.808 ; 70.732,64.929 71.053,64.609 71.053,58.318
ADC9: ADCH.2 IC3.88 | length 58.8
  Top Layer w0.15: IC3.88@68.58,68.71 v1@68.58,70.383
  Top Layer w0.2: v1(68.301,70.663) v1@68.58,70.383
  Bottom Layer w0.2: ADCH.2@66.04,35.56 67.107,34.493 69.113,34.493 69.78,35.16 69.78,49.041 69.205,49.616 ; 68.853,57.017 68.853,59.363 69.821,60.331 69.821,63.094 69.526,63.389 ; 68.853,57.017 69.205,56.665 69.205,49.616 ; 68.853,57.017 68.853,55.658 69.155,55.356 69.155,49.666 69.205,49.616 ; 69.127,68.452 68.301,69.278 v1(68.301,70.663) 69.127,69.836 69.127,68.452 ; 69.127,68.452 69.526,68.053 69.526,63.389 ; 69.127,68.452 69.127,63.788 69.526,63.389
ADC10: ADCH.3 IC3.87 | length 53.6
  Top Layer w0.15: IC3.87@69.08,68.71 69.08,71.357
  Top Layer w0.2: v1(68.504,71.933) 69.08,71.357
  Bottom Layer w0.2: v1(68.504,71.933) 67.907,71.933 67.488,71.513 67.488,68.886 68.727,67.646 ; ADCH.3@68.58,35.56 69.38,36.36 69.38,48.641 68.78,49.241 ; 68.453,55.46 68.78,55.133 68.78,49.241 ; 68.453,55.46 68.453,55.258 68.755,54.956 68.755,49.266 68.78,49.241 ; 68.453,55.46 68.453,59.763 69.421,60.731 69.421,62.8 69.126,63.094 ; 68.727,67.646 68.727,63.493 69.126,63.094 ; 68.727,67.646 69.126,67.248 69.126,63.094
ADC11: ADCH.4 IC3.86 | length 57.4
  Top Layer w0.15: IC3.86@69.58,68.71 69.58,72.778
  Top Layer w0.2: v1(69.063,73.295) 69.58,72.778
  Bottom Layer w0.2: v1(69.063,73.295) 69.533,72.825 69.533,68.852 ; ADCH.4@71.12,35.56 71.12,48.501 69.605,50.016 ; 69.253,57.417 69.605,57.065 69.605,50.016 ; 69.253,57.417 69.253,56.058 69.555,55.756 69.555,50.066 69.605,50.016 ; 69.253,57.417 69.253,58.963 70.221,59.931 70.221,63.494 ; 69.533,68.852 69.932,68.453 69.932,64.248 70.221,63.96 70.221,63.494 ; 69.533,68.852 69.533,64.182 70.221,63.494
ADC12: ADCH.5 IC3.85 | length 71.7
  Top Layer w0.15: 70.08,65.683 IC3.85@70.08,68.71
  Top Layer w0.2: 70.08,65.683 v1(71.857,63.906)
  Bottom Layer w0.2: v1(71.857,63.906) 71.679,63.729 71.679,57.658 73.99,55.347 79.578,55.347 81.59,57.358 87.016,57.358 87.427,56.947 87.427,52.73 86.97,52.273 76.937,52.273 73.66,48.997 ADCH.5@73.66,35.56 77.648,39.548 77.648,43.078
ADC13: ADCH.6 IC3.84 | length 105.2
  Top Layer w0.15: 70.58,67.158 IC3.84@70.58,68.71
  Top Layer w0.2: 70.58,67.158 72.561,65.176 v1(74.092,65.176)
  Bottom Layer w0.2: v1(74.092,65.176) 75.438,63.83 77.343,63.83 ; 74.168,67.005 77.343,63.83 ; 77.343,63.83 78.029,63.144 79.083,63.144 83.041,67.102 ; 77.343,63.83 79.731,63.83 83.002,67.102 83.041,67.102 ; 79.781,51.867 84.43,51.867 ; 79.781,51.867 78.511,50.597 78.511,37.871 ADCH.6@76.2,35.56 76.2,48.92 79.146,51.867 79.781,51.867 ; 83.041,67.102 86.974,67.102 ; 84.43,51.867 84.887,51.41 84.887,49.779 85.344,49.322 86.924,49.322 88.087,49.047 88.64,49.6 88.64,53.035 ; 84.43,51.867 87.471,51.867 88.64,53.035 ; 86.974,67.102 88.64,65.437 ; 86.974,67.102 87.051,67.102 88.64,65.513 88.64,65.437 ; 88.64,53.035 88.64,65.437
ADC14: ADCH.7 IC3.83 | length 129.3
  Top Layer w0.15: IC3.83@71.08,68.71 71.08,70.039 72.822,71.78
  Top Layer w0.2: 72.822,71.78 72.822,73.152 75.794,76.124 75.794,80.264 81.509,85.979 89.586,85.979 90.246,85.319 90.246,42.951 89.002,41.707 85.75,41.707 85.293,41.25 85.293,37.973 84.125,36.805 79.985,36.805 ADCH.7@78.74,35.56
  Bottom Layer w0.2: 73.584,65.659 73.749,65.494 73.749,58.337 72.746,57.334 70.498,55.458 70.498,50.711 72.593,48.615 72.593,35.052 73.152,34.493 77.673,34.493 ADCH.7@78.74,35.56
ADC15: ADCH.8 IC3.82 | length 64.8
  Top Layer w0.15: IC3.82@71.58,68.71 71.58,67.688 72.136,67.132
  Top Layer w0.2: 72.136,67.132 v1(72.949,67.132)
  Bottom Layer w0.2: 72.136,67.132 73.076,68.072 74.31,68.072 75.25,67.132 ; v1(72.949,67.132) 75.25,67.132 ; ADCH.8@81.28,35.56 81.407,35.687 81.407,45.847 82.347,46.787 87.376,46.787 89.04,48.45 89.04,65.838 ; 75.25,67.132 77.968,64.414 79.594,64.414 82.681,67.502 87.376,67.502 ; 87.376,67.502 89.04,65.838 ; 87.376,67.502 87.902,67.502 89.04,66.364 89.04,65.838
AREF: C44.1 IC3.98 JP1.3 | length 83.1
  Top Layer w0.15: IC3.98@63.58,68.71 C44.1@63.58,70.37
  Top Layer w0.2: JP1.3@13.716,83.82 17.177,87.281 63.24,87.281 64.973,85.547 64.973,81.712 71.996,74.689 71.996,73.635 71.73,73.368 70.371,73.368 68.326,75.412 66.126,75.412 64.681,73.968 64.681,71.272 64.148,70.739 64.148,70.37 C44.1@63.754,70.37 C44.1@63.58,70.37
GND: C1.1 C2.1 C3.1 C6.1 C8.1 C9.1 C10.1 C11.1 C12.1 C13.1 C16.1 C18.1 C19.1 C20.1 C21.1 C22.1 C23.1 C26.1 C28.1 C29.1 C30.1 C31.1 C32.1 C33.1 C34.1 C37.1 C38.1 C42.1 C43.2 C44.2 C45.2 C46.2 C47.2 C48.2 C49.2 C50.2 C51.2 C52.1 C53.1 C54.2 IC3.11 IC3.32 IC3.62 IC3.81 IC3.99 IC5.1 IC5.3 IC6.1 IC6.3 IC8.1 IC8.3 IC9.1 IC9.3 ICSP.6 JP1.4 POWER.6 POWER.7 R2.1 R3.1 R6.1 R7.1 R10.1 R12.1 R13.1 R17.1 RN6.2 U1.4 U1.6 U1.7 U1.9 U1.13 U1.17 U2.4 U2.6 U2.7 U2.9 U2.13 U2.17 U3.4 U3.6 U3.7 U3.9 U3.13 U3.17 U4.3 U4.10 U4.11 U5.3 U5.17 U7A.3 U7A.19 XIO.35 XIO.36 Y1.2 | length 907.9
  Top Layer w0.125: U5.3@29.855,10.91 U5.17@31.75,10.91
  Top Layer w0.15: U7A.3@24.715,68.06 27.19,68.06 ; U7A.19@31.165,66.56 C54.2@33.02,66.56 ; IC3.11@60.83,61.96 62.544,61.96 63.665,63.081 63.665,63.303 63.786,63.424 63.786,65.602 63.576,65.811 63.576,67.347 63.08,67.843 IC3.99@63.08,68.71 ; 65.373,43.415 65.373,48.975 65.373,51.823 65.58,52.03 IC3.32@65.58,53.21 65.58,58.334 ; 66.192,60.681 75.079,60.681 75.3,60.46 IC3.62@76.33,60.46 ; IC3.81@72.08,68.71 72.08,70.434
  Top Layer w0.153: U1.7@46.153,11.45 U1.17@48.26,11.45 ; U1.6@46.153,11.95 45.657,11.95 45.415,12.192 45.415,12.95 U1.4@46.153,12.95 ; 50.292,8.738 50.292,10.95 U1.9@50.367,10.95 ; 63.665,11.773 64.973,11.773 ; U2.6@65.711,11.95 65.15,11.95 64.973,11.773 ; U2.4@65.711,12.95 65.227,12.95 64.973,12.696 64.973,11.773 ; 68.044,10.95 69.416,10.95 ; 69.901,8.393 U2.9@69.901,10.95 ; U2.9@69.925,10.95 U2.9@69.901,10.95 ; U2.13@69.925,12.95 69.19,12.95 69.19,11.176 69.416,10.95 ; 83.045,11.95 U3.6@84.253,11.95 ; U3.7@84.253,11.45 U3.17@86.36,11.45 ; U3.4@84.253,12.95 85.166,12.95 ; 87.524,12.95 U3.13@88.467,12.95 ; U3.9@88.467,10.95 88.621,10.95 88.621,9.144 88.621,8.673 ; 69.416,10.95 U2.9@69.901,10.95
  Top Layer w0.2: C31.1@5.65,10.668 C32.1@5.65,12.7 5.65,13.219 5.893,13.462 7.991,13.462 8.103,13.35 U4.3@8.988,13.35 11.608,13.35 12.258,12.7 U4.11@14.888,12.7 U4.10@14.888,12.05 ; C33.1@12.13,8.89 12.13,10.77 13.41,12.05 U4.10@14.888,12.05 ; C43.2@13.97,40.12 15.076,40.12 16.612,41.656 16.612,44.348 ; C42.1@21.844,4.38 23.557,4.38 25.197,6.02 29.123,6.02 29.656,5.486 C38.1@29.656,4.826 ; C34.1@22.606,16.194 23.368,16.194 23.368,16.041 ; POWER.6@30.48,35.56 30.48,26.162 30.288,25.97 C37.1@30.288,16.764 29.667,16.764 29.147,16.244 R17.1@24.384,16.244 ; U5.17@31.75,10.91 U5.17@31.75,10.16 31.75,6.706 31.731,6.687 31.731,5.874 30.683,4.826 C38.1@29.656,4.826 ; C54.2@33.02,66.56 C50.2@34.544,66.56 36.982,66.56 38.075,67.652 38.075,74.18 C53.1@38.1,74.18 C52.1@43.18,74.18 ; R3.1@40.386,12.966 42.698,10.654 ; C6.1@43.942,11.622 42.998,11.622 42.698,11.322 42.698,10.654 ; v1(45.263,71.171) 47.219,73.127 51.994,73.127 55.702,69.418 55.702,68.256 RN6.2@55.764,68.256 ; U1.7@46.153,11.45 U1.6@46.153,11.95 ; 46.392,9.128 46.159,9.128 v1(45.476,8.444) ; U1.17@48.26,11.45 U1.17@48.26,12.7 ; IC6.1@48.626,65.931 48.626,65.42 49.149,64.897 49.149,64.173 49.987,63.335 ; IC5.1@48.626,69.741 48.626,69.291 48.905,69.012 49.647,69.012 ; IC9.3@49.926,58.311 49.926,57.582 48.626,57.582 IC9.1@48.626,58.311 ; IC8.3@49.926,62.121 49.926,61.595 ; IC6.3@49.926,65.931 49.926,66.269 50.495,66.838 50.495,68.697 ; IC5.3@49.926,69.741 49.926,69.291 ; 50.292,8.738 49.998,8.444 C10.1@49.53,8.444 C9.1@48.26,8.444 C8.1@46.99,8.444 v1(45.476,8.444) ; U1.13@50.367,12.95 49.424,12.95 49.174,12.7 U1.17@48.26,12.7 ; R2.1@54.356,19.292 54.356,20.015 54.04,20.331 C1.1@54.04,21.082 ; v1(56.058,21.082) C1.1@54.04,21.082 ; v1(58.114,21.082) 67.132,21.082 67.615,20.599 67.615,14.859 67.818,14.656 U2.17@67.818,12.7 ; C47.2@59.944,71.87 C45.2@61.214,71.87 C46.2@62.484,71.87 62.992,71.87 ; R7.1@60.198,16.268 60.477,16.268 v1(61.531,15.215) ; C16.1@63.246,13.524 63.246,12.192 63.665,11.773 ; 63.665,63.081 63.665,60.249 65.58,58.334 ; 63.786,63.424 63.786,63.087 66.192,60.681 ; 65.373,43.415 68.148,40.64 73.708,40.64 ; U2.7@65.711,11.45 U2.6@65.711,11.95 ; U2.4@65.711,12.95 66.624,12.95 66.874,12.7 U2.17@67.818,12.7 ; C18.1@66.294,8.19 C19.1@67.691,8.19 C20.1@69.088,8.19 69.698,8.19 69.901,8.393 ; 68.044,10.95 67.818,11.176 U2.17@67.818,12.7 ; v1(71.196,74.168) 69.552,75.812 65.525,75.812 63.881,74.168 63.881,71.87 C44.2@63.754,71.87 62.992,71.87 ; 72.08,70.434 v1(74.083,72.437) ; C13.1@72.836,23.495 C12.1@72.836,22.225 C11.1@72.836,20.828 72.836,20.077 73.152,19.761 R6.1@73.152,19.038 73.901,19.038 76.295,16.643 76.295,11.932 75.782,11.418 72.136,11.418 72.136,10.084 75.082,7.137 78.461,7.137 ; R12.1@80.772,16.776 80.595,16.776 80.595,16.053 78.867,14.326 78.867,10.566 79.654,9.779 79.654,8.331 78.461,7.137 ; C26.1@82.55,13.524 82.069,13.524 81.775,13.818 81.775,15.456 82.347,16.027 83.312,16.027 83.718,16.434 83.718,24.994 84.125,25.4 86.487,25.4 86.893,25.806 86.893,26.441 87.376,26.924 88.9,26.924 88.9,26.416 C23.1@89.6,26.162 ; v1(82.582,11.487) 83.045,11.95 ; XIO.35@83.82,40.64 73.708,40.64 ; U3.7@84.253,11.45 U3.6@84.253,11.95 ; 85.166,12.95 85.416,12.7 U3.17@86.36,12.7 ; U3.17@86.36,11.45 U3.17@86.36,12.7 ; XIO.36@86.36,40.64 89.6,37.4 C23.1@89.6,26.162 ; 87.524,12.95 87.274,12.7 U3.17@86.36,12.7 ; 88.621,8.673 88.392,8.444 C30.1@87.884,8.444 C29.1@86.487,8.444 C28.1@85.09,8.444 85.09,7.696 84.531,7.137 78.461,7.137 ; 88.621,9.144 89.321,8.444 93.813,8.444 94.132,8.763 94.132,18.503 ; R10.1@91.694,19.57 93.066,19.57 94.132,18.503 ; U4.10@14.888,12.05 21.448,12.05 ; 16.612,44.348 16.612,67.691 17.069,68.148 20.472,68.148 24.028,71.704 28.194,71.704 32.69,76.2 ; 16.612,44.348 24.333,36.627 24.333,34.955 24.79,34.498 26.01,34.498 26.462,34.95 26.462,36.779 27.275,37.592 30.988,37.592 POWER.7@33.02,35.56 33.02,54.952 36.5,58.432 C49.2@40.386,58.432 C48.2@42.037,58.432 45.263,58.432 45.384,58.311 IC9.1@48.626,58.311 ; 21.448,12.05 20.523,11.125 20.523,2.642 21.387,1.778 29.464,1.778 29.706,2.02 R13.1@29.706,2.54 29.706,3.658 29.656,3.708 C38.1@29.656,4.826 ; 21.448,12.05 23.368,13.97 23.368,16.041 ; 23.368,16.041 23.571,16.244 R17.1@24.384,16.244 ; 23.368,16.041 R17.1@24.384,16.244 ; 32.69,76.2 25.4,76.2 ICSP.6@24.13,74.93 19.101,74.93 17.78,73.609 C51.2@17.78,71.87 16.662,71.87 16.256,72.276 JP1.4@16.256,83.82 19.317,86.881 59.627,86.881 62.433,84.074 62.433,72.429 62.992,71.87 ; 32.69,76.2 35.052,78.562 42.799,78.562 43.942,77.419 43.942,74.434 ; 42.698,10.654 42.698,8.331 43.036,7.992 44.298,7.992 44.749,8.444 v1(45.476,8.444) ; C52.1@43.18,74.18 43.688,74.18 43.942,74.434 ; C52.1@43.18,74.18 43.942,74.434 ; U1.17@48.26,12.7 48.26,18.136 48.44,18.316 48.44,24.539 49.047,25.146 53.481,25.146 54.04,24.587 C3.1@54.04,23.622 ; IC9.1@48.626,58.311 48.626,59.157 49.149,59.68 49.149,60.818 49.723,61.392 ; 49.647,69.012 49.926,69.291 ; 49.647,69.012 50.18,69.012 ; 49.723,61.392 49.022,61.392 48.626,61.788 IC8.1@48.626,62.121 48.626,62.967 48.994,63.335 49.987,63.335 ; 49.723,61.392 49.926,61.595 ; 49.926,61.595 50.695,62.364 51.549,62.364 52.057,61.856 52.057,60.46 52.985,59.532 52.985,53.797 57.163,49.619 59.669,49.619 59.91,49.378 Y1.2@59.91,49.022 ; 49.926,69.291 49.926,69.266 50.18,69.012 ; 49.987,63.335 51.613,63.335 52.451,64.173 52.451,67.215 52.293,67.373 51.206,67.373 50.787,67.792 50.787,68.404 50.495,68.697 ; 50.18,69.012 50.495,68.697 ; C1.1@54.04,21.082 C2.1@54.04,22.352 C3.1@54.04,23.622 ; C3.1@54.04,23.622 55.778,23.622 59.91,27.754 Y1.2@59.91,49.022 ; Y1.2@59.91,49.022 Y1.2@62.56,49.022 65.326,49.022 65.373,48.975 73.708,40.64 ; C23.1@89.6,26.162 C22.1@89.6,24.892 C21.1@89.6,23.622 93.853,23.622 94.132,23.343 94.132,18.503
  Bottom Layer w0.2: ICSP.6@24.13,74.93 24.13,72.847 ; 27.19,68.06 26.772,68.478 ; 27.254,67.996 26.772,68.478 ; POWER.6@30.48,35.56 POWER.7@33.02,35.56 ; 41.046,9.728 44.192,9.728 44.792,9.128 45.969,9.128 46.392,9.55 ; v1(45.263,71.171) 27.838,71.171 ; v1(45.476,8.444) 46.159,9.128 ; v1(58.114,21.082) 56.889,19.857 ; 61.531,11.76 78.639,11.76 ; v1(61.531,15.215) 57.848,18.898 ; v1(71.196,74.168) 71.67,74.168 72.483,74.981 ; v1(74.083,72.437) 74.083,74.574 ; v1(82.582,11.487) 81.765,12.304 79.182,12.304 78.639,11.76 ; XIO.35@83.82,40.64 XIO.36@86.36,40.64 ; 24.13,72.847 24.13,71.12 26.772,68.478 ; 24.13,72.847 25.806,71.171 27.838,71.171 ; 26.772,68.478 26.772,70.104 27.838,71.171 ; 46.159,9.128 46.392,9.128 ; 46.159,9.128 46.392,9.36 ; 46.392,9.128 76.006,9.128 78.639,11.76 ; 46.392,9.128 46.392,9.36 ; 46.392,9.36 55.929,18.898 ; 46.392,9.36 46.392,9.55 ; 46.392,9.55 46.392,11.416 v1(56.058,21.082) 56.058,20.688 56.889,19.857 ; 55.929,18.898 57.848,18.898 ; 55.929,18.898 56.889,19.857 ; 56.889,19.857 57.848,18.898 ; 72.483,74.981 73.677,74.981 74.083,74.574 ; 72.483,74.981 72.483,75.518 72.746,75.781 73.762,75.781 74.083,75.459 74.083,74.574
  other v2: 31.25,8.66 32.25,8.66 31.25,9.66 32.25,9.66 31.25,10.66 32.25,10.66 31.25,11.66 32.25,11.66
GPX_MAX: IC3.66 U7A.17 | length 100.8
  Top Layer w0.15: U7A.17@31.165,65.56 31.926,65.56 v1(34.24,63.246) ; 69.61,62.46 IC3.66@76.33,62.46
  Top Layer w0.2: v1(66.708,64.357) 67.713,64.357 69.61,62.46
  Bottom Layer w0.2: v1(34.24,63.246) 44.634,52.852 44.634,34.974 45.11,34.498 48.768,34.498 49.322,35.052 49.322,56.286 50.135,57.099 54.941,57.099 55.799,56.241 59.029,56.241 61.296,58.508 63.195,58.508 ; v1@66.302,64.357 65.741,63.796 65.741,63.39 ; v1(66.708,64.357) 65.741,63.39 ; 63.195,58.508 63.984,59.296 65.43,59.296 ; 63.195,58.508 64.642,58.508 65.43,59.296 ; 65.43,59.296 65.741,59.607 65.741,63.39
INT_MAX: RN6.4 U7A.18 | length 36.4
  Top Layer w0.15: U7A.18@31.165,66.06 31.933,66.06 32.08,65.913 36.932,65.913
  Top Layer w0.2: 36.932,65.913 46.152,75.133 54.585,75.133 56.539,73.179 56.539,67.709 56.286,67.456 RN6.4@55.764,67.456
MOSI_3V3: IC9.4 U7A.16 | length 29.2
  Top Layer w0.15: U7A.16@29.69,64.085 29.69,64.719 v1(30.429,64.719)
  Top Layer w0.2: IC9.4@49.926,60.561 49.926,60.325 50.724,60.325 50.724,60.35
  Bottom Layer w0.2: v1(30.429,64.719) 30.645,64.935 51.727,64.935 51.841,64.821 51.841,63.373 50.444,61.976 50.444,60.63 50.724,60.35 50.724,60.325
NetC4_1: C4.1 U1.11 | length 2.3
  Top Layer w0.153: U1.11@50.367,11.95 51.536,11.95
  Top Layer w0.2: 51.536,11.95 51.878,11.608 C4.1@51.878,10.922
NetC4_2: C4.2 L1.2 U1.12 | length 6.9
  Top Layer w0.15: 54.61,11.481 L1.2@54.61,12.858
  Top Layer w0.153: U1.12@50.367,12.45 52.426,12.45
  Top Layer w0.2: 52.426,12.45 53.278,11.598 C4.2@53.278,10.922 54.051,10.922 54.61,11.481
NetC5_1: C5.1 U1.15 | length 1.6
  Top Layer w0.153: U1.15@50.367,13.95 50.978,13.95 51.252,14.224 C5.1@51.878,14.224
NetC5_2: C5.2 L1.1 U1.14 | length 5.2
  Top Layer w0.15: 53.944,14.224 L1.1@54.61,13.558
  Top Layer w0.153: U1.14@50.367,13.45 53.035,13.45
  Top Layer w0.2: 53.035,13.45 53.278,13.693 C5.2@53.278,14.224 53.944,14.224
NetC6_2: C6.2 U1.1 U1.8 | length 15.7
  Top Layer w0.153: v1(45.034,15.164) 45.034,14.653 ; v1(45.568,9.931) 45.568,9.957 45.949,10.338 45.949,10.95 U1.8@46.153,10.95 ; 45.034,14.653 U1.1@46.153,14.45 45.034,14.653
  Top Layer w0.2: C6.2@43.942,10.222 v1(45.034,10.222)
  Bottom Layer w0.2: v1(45.034,10.222) v1(45.034,15.164) 45.593,14.605 45.593,10.222 45.593,9.957 v1(45.568,9.931)
NetC7_1: C7.1 R3.2 R4.1 U1.5 | length 27.6
  Top Layer w0.153: U1.5@46.153,12.45 46.736,12.45 46.965,12.679 46.965,14.834 46.965,17.416
  Top Layer w0.2: R3.2@40.386,14.466 R4.1@41.91,14.466 41.91,20.168 42.367,20.625 48.04,20.625 48.04,18.491 46.965,17.416 ; C7.1@43.942,14.416 43.942,15.491 44.429,15.979 45.819,15.979 46.965,14.834
NetC14_1: C14.1 U2.15 | length 37.3
  Top Layer w0.153: 68.021,15.215 69.286,13.95 U2.15@69.925,13.95
  Top Layer w0.2: 68.021,15.215 68.021,24.587 68.605,25.171 74.701,25.171 76.695,23.178 76.695,11.646 75.717,10.668 C14.1@72.836,10.668
NetC14_2: C14.2 L2.1 U2.14 | length 16
  Top Layer w0.15: 71.822,11.818 75.438,11.818 L2.1@75.438,12.096 75.596,12.096 75.876,12.376 75.876,14.472
  Top Layer w0.153: U2.14@69.925,13.45 70.51,13.45 70.714,13.653 70.714,14.834
  Top Layer w0.2: 70.714,14.834 71.603,15.723 74.625,15.723 75.876,14.472 ; C14.2@71.436,10.668 71.436,11.432 71.822,11.818
NetC15_1: C15.1 U2.11 | length 4.3
  Top Layer w0.153: U2.11@69.925,11.95 71.349,11.95
  Top Layer w0.2: 71.349,11.95 72.836,13.437 C15.1@72.836,14.224
NetC15_2: C15.2 L2.2 U2.12 | length 9.1
  Top Layer w0.15: L2.2@75.438,12.796 75.438,14.021
  Top Layer w0.153: U2.12@69.925,12.45 70.79,12.45 71.436,13.096
  Top Layer w0.2: 71.436,13.096 C15.2@71.436,14.224 71.436,14.692 71.73,14.986 74.473,14.986 75.438,14.021
NetC16_2: C16.2 U2.1 U2.8 | length 9.9
  Top Layer w0.153: 63.38,10.95 U2.8@65.711,10.95 ; 64.516,14.924 64.99,14.45 U2.1@65.711,14.45
  Top Layer w0.2: 63.38,10.95 62.484,11.846 62.484,14.63 62.778,14.924 C16.2@63.246,14.924 64.516,14.924
NetC17_1: C17.1 R7.2 R8.1 U2.5 | length 20
  Top Layer w0.153: U2.5@65.711,12.45 66.243,12.45 66.446,12.247 66.446,10.617
  Top Layer w0.2: C17.1@63.246,16.318 62.509,16.318 62.459,16.268 R8.1@61.722,16.268 61.698,16.268 R7.2@60.198,17.768 59.868,17.768 59.448,17.348 59.448,12.332 61.366,10.414 66.243,10.414 66.446,10.617
NetC24_1: C24.1 U3.15 | length 13.6
  Top Layer w0.153: 87.559,14.427 88.036,13.95 U3.15@88.467,13.95
  Top Layer w0.2: v1(86.411,15.621) 86.411,15.576 87.559,14.427 ; C24.1@91.124,10.414 91.643,10.414 91.846,10.617 91.846,14.935 v1(91.161,15.621)
  Bottom Layer w0.2: v1(86.411,15.621) v1(91.161,15.621)
NetC24_2: C24.2 L3.1 U3.14 | length 28.2
  Top Layer w0.15: 90.018,9.423 93.218,9.423 L3.1@93.218,9.81 93.218,9.83 93.472,9.83 93.675,10.033 93.675,14.986
  Top Layer w0.153: 87.732,17.272 87.732,13.704 87.986,13.45 U3.14@88.467,13.45
  Top Layer w0.2: 87.732,17.272 86.58,18.424 86.58,20.117 86.817,20.354 88.189,20.354 88.68,19.863 88.68,18.427 89.629,17.478 91.184,17.478 93.675,14.986 ; C24.2@89.724,10.414 89.724,9.717 90.018,9.423
NetC25_1: C25.1 U3.11 | length 4.6
  Top Layer w0.153: U3.11@88.467,11.95 91.059,11.95
  Top Layer w0.2: 91.059,11.95 91.124,12.015 C25.1@91.124,13.97